# Altium PCB IMMO-2017-10-10.PcbDoc
Units mm, origin at the board's own origin, x right, y up, seen from the top; angles counter-clockwise.
Board outline 420.07 x 335 mm, 2 copper layers (Top Layer, Bottom Layer); 79 components, 117 nets, 440 pads, 62 vias.
Unrouted connection lines stored in the file: 1.
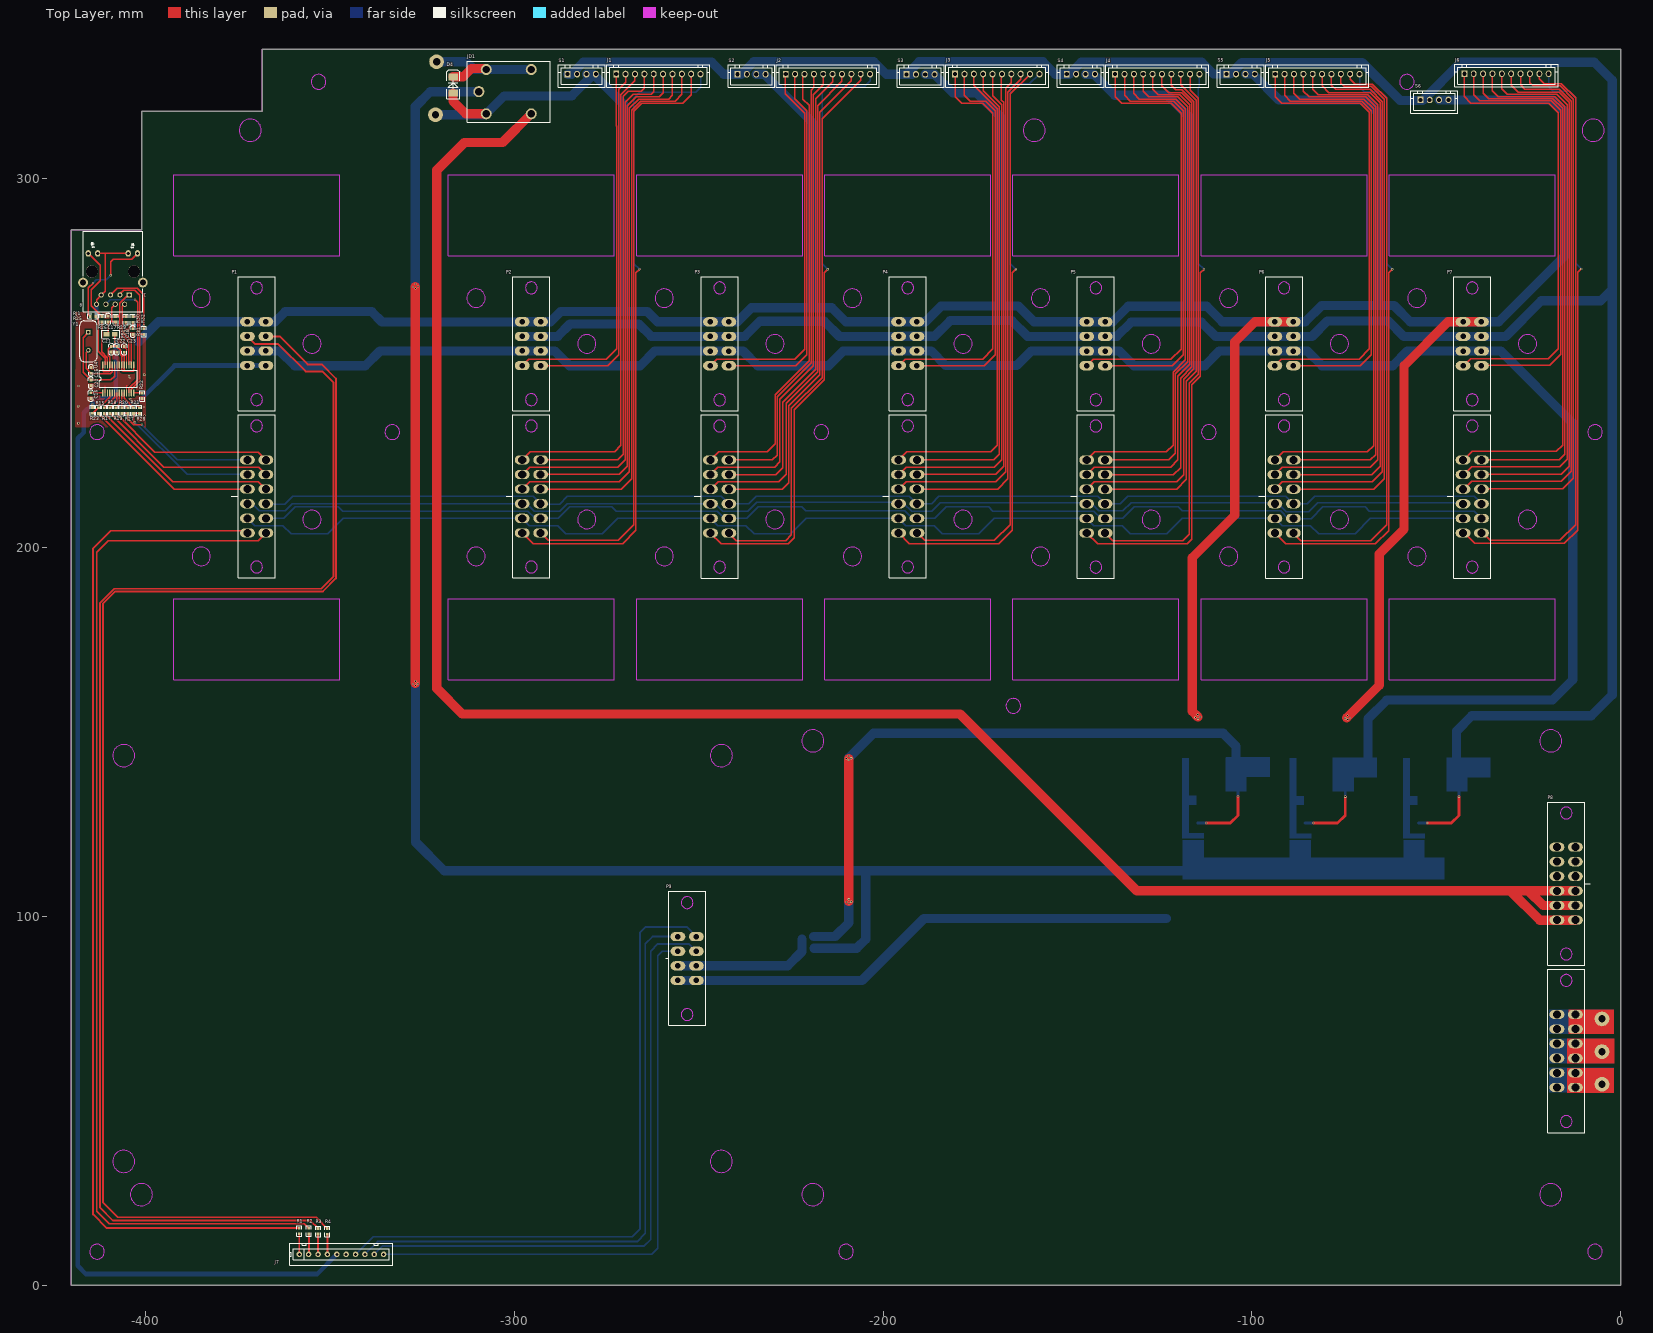
[diagram p0: Top Layer view]
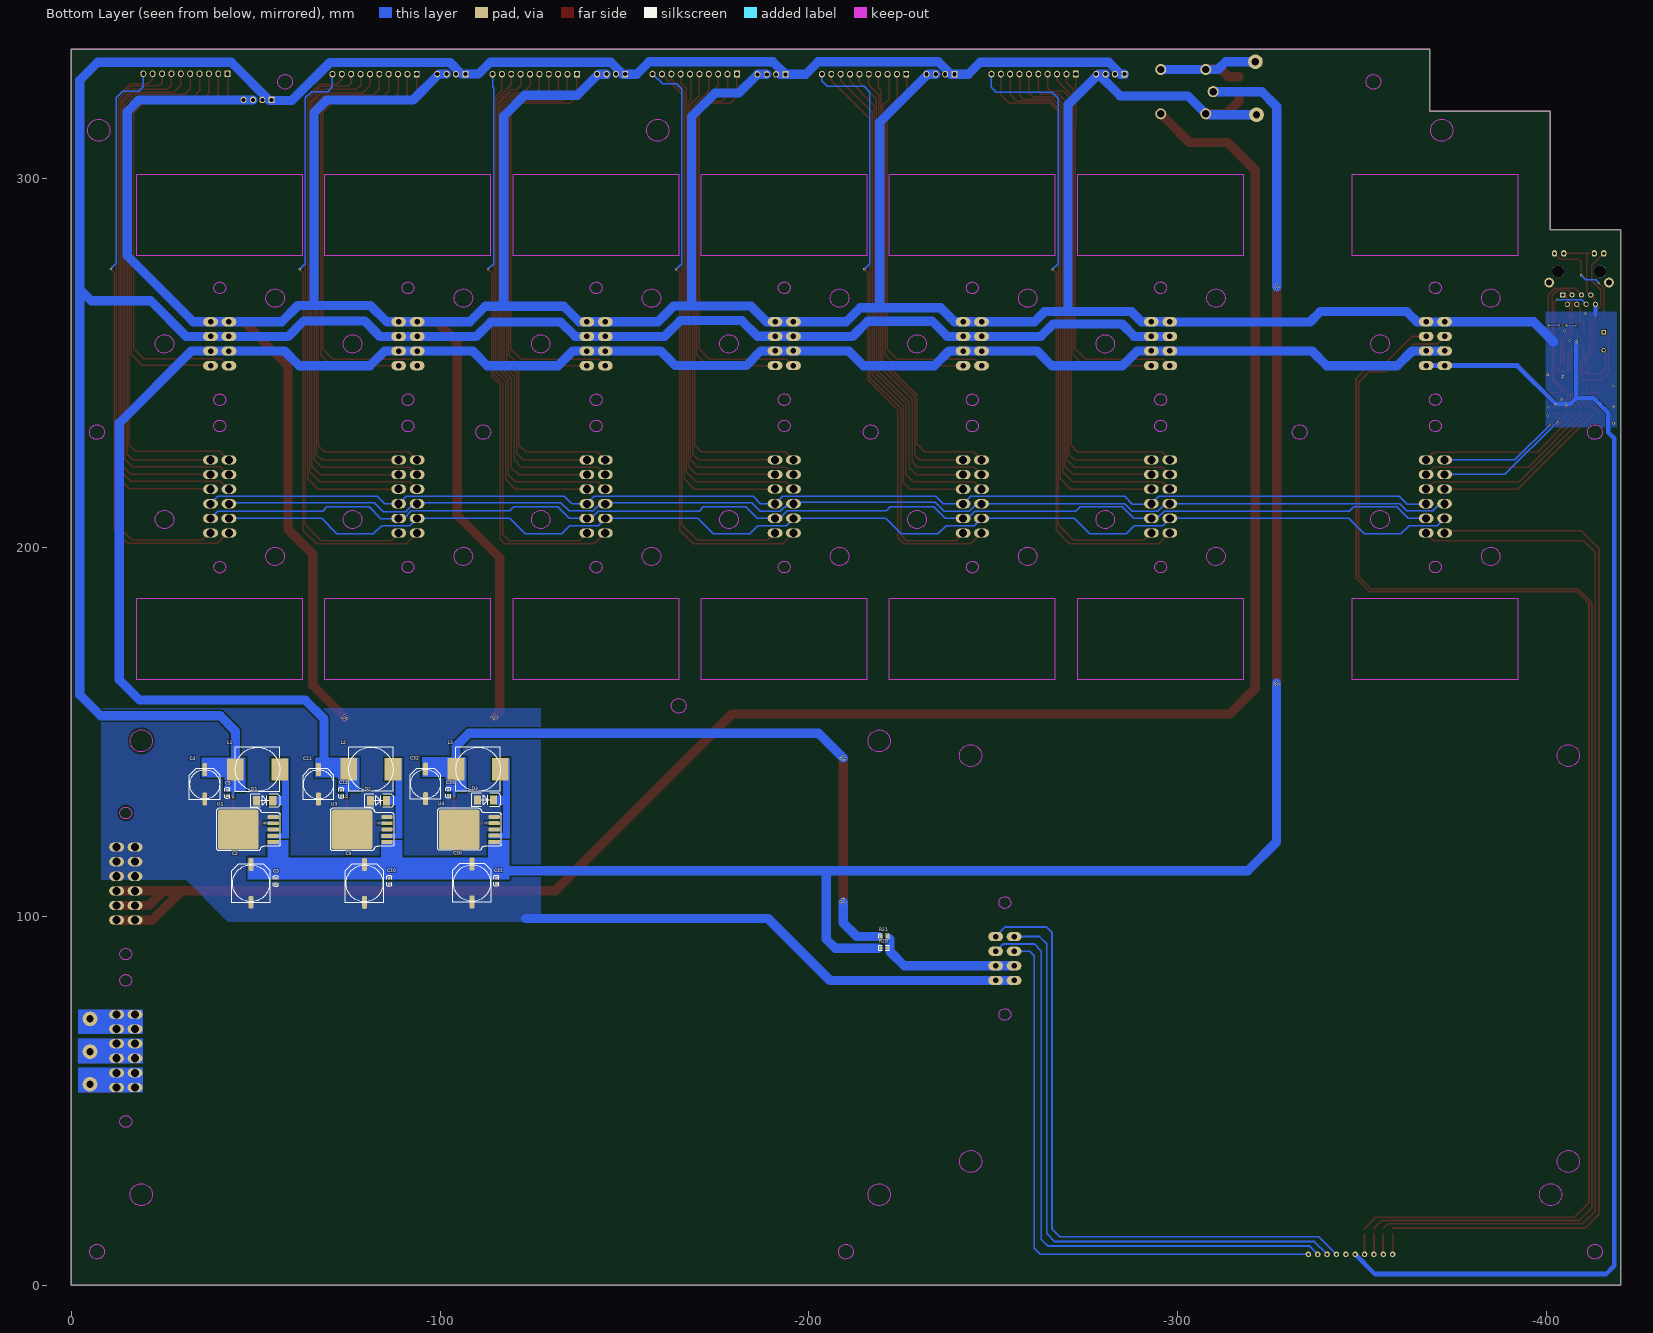
[diagram p1: Bottom Layer view, seen from below]
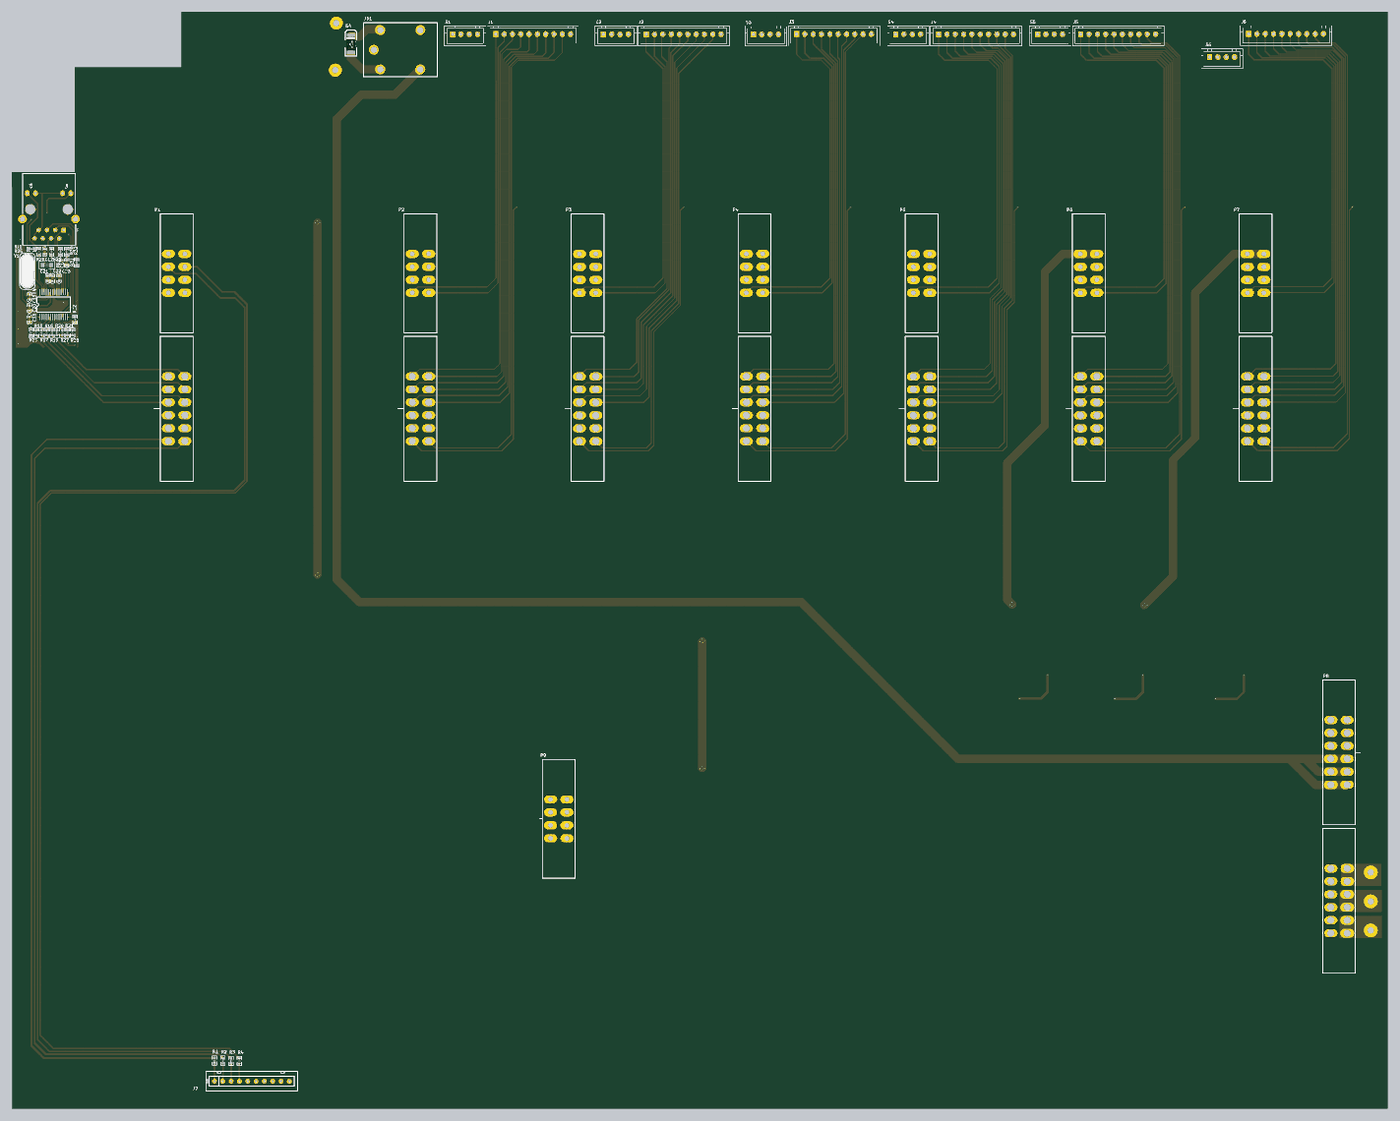
[diagram p2: 3D render of the assembled board from above, using the file's embedded part models]
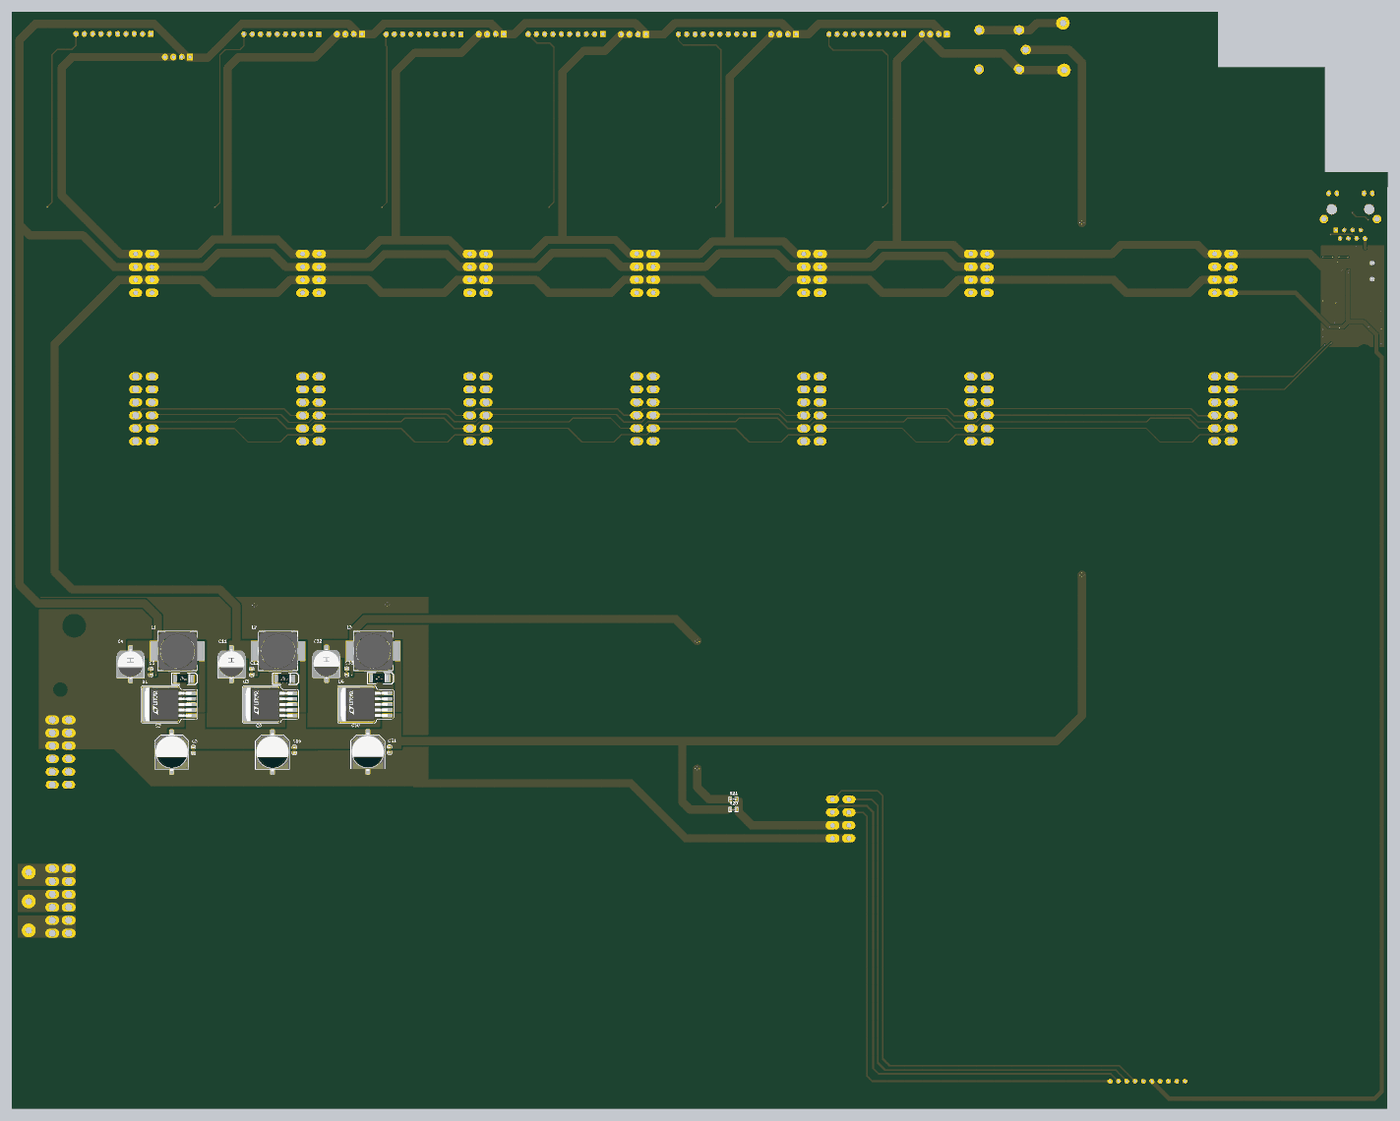
[diagram p3: 3D render of the assembled board from below, using the file's embedded part models]

## Layer stack, top to bottom
Top Layer: signal copper 0.0356
Dielectric: core 0.32, FR-4, Dk 4.8
Bottom Layer: signal copper 0.0356

## Board outline
-368.3,335 -368.3,318.1 -400.874,318.1 -400.874,286.203 -400.971,286.106 -420.065,286.106 -420.065,281.534 -420.04,281.508 -420,281.468 -420,0 0,0 0,335

## Design rules (kind name [scope] priority, off if disabled: settings)
Clearance [All] p1: gap=0.203
DiffPairsRouting [All] p1: maxlimit=0.254 minlimit=0.254 mostfreqgap=0.254 maxuncoupledlength=12.7
PlaneConnect [All] p1: planeconnectstyle=Direct reliefexpansion=0.508 reliefentries=4 reliefconductorwidth=0.254 reliefairgap=0.254
PolygonConnect [All] p1: connectstyle=Direct reliefconductorwidth=0.254 reliefentries=4 polygonreliefangle="90 Angle" airgapwidth=0.254
RoutingVias [All] p1: holewidth=0.711 width=1.27 viastyle="Through Hole" minholewidth=0.711 minwidth=1.27 maxholewidth=0.711 maxwidth=1.27
SolderMaskExpansion [All] p1: expansion=0.102
Width [All] p1: maxlimit=5.08 minlimit=0.254 preferedwidth=0.254
26 further rules are at their usual default settings.

## Classes and differential pairs
component class 02-MCU: C2 C3 C4 C5 C9 C10 C11 C12 C15 C16 C17 C18 C20 C21 C22 C23 C30 C31 C32 C33 D2 D3 D4 FB1 J1 J2 J3 J4 J5 J6 J7 JD1 L1 L2 L3 P1 P2 P3 P4 P5 P6 P7 P8 P9 R3 R4 R15 R17 R18 R19 R20 R21 R22 R23 R25 R26 R27 R28 R29 R30 R31 R32 RJ1 S1 S2 S3 S4 S5 S6 U1 U3 U4 Y1
differential pair TPIN1: +TPIN1_P -TPIN1_N
differential pair TPOUT1: +TPOUT1_P -TPOUT1_N

## Components (designator, comment, footprint, x,y, rotation, side; value= is the part's Value field where it differs from the comment)
C2 "220uF/50V,K-10" ED10 -48.768,108.89 r270 bottom
C3 "100n,50V,J" C0603 -55.423,110.261 r270 bottom
C4 "220uF/35V,K-8" ED8 -36.22,135.738 r270 bottom
C5 "100n,50V,J" C0603 -42.367,134.137 r270 bottom
C9 "220uF/50V,K-10" ED10 -79.527,108.864 r270 bottom
C10 "100n,50V,J" C0603 -86.233,110.312 r270 bottom
C11 "220uF/35V,K-8" ED8 -67.056,135.738 r270 bottom
C12 "100n,50V,J" C0603 -73.203,134.163 r270 bottom
C15 "30p,50V,J" C0603 -414.68,247.167 r90 top
C16 "30p,50V,J" C0603 -414.706,245.339 r270 top
C17 "100n,50V,J" C0603 -410.058,261.061 r90 top
C18 "100n,50V,J" C0603 -403.352,259.207 r270 top
C20 "10u,50V,J" C0603 -414.731,240.309 r90 top
C21 "100n,50V,J" C0603 -409.169,254.406 r270 top
C22 "100n,50V,J" C0603 -407.695,254.381 r270 top
C23 "100n,50V,J" C0603 -405.681,252.857 r90 top
C30 "220uF/50V,K-10" ED10 -108.661,108.966 r270 bottom
C31 "100n,50V,J" C0603 -115.265,110.338 r270 bottom
C32 "220uF/35V,K-8" ED8 -96.063,135.839 r270 bottom
C33 "100n,50V,J" C0603 -102.21,134.214 r270 bottom
D1 "STK-40V/5A(SS54)" SMA -50.978,131.369 r180 bottom
D2 "STK-40V/5A(SS54)" SMA -81.813,131.369 r180 bottom
D3 "STK-40V/5A(SS54)" SMA -110.846,131.521 r180 bottom
D4 "STK-40V/2A(SS24)" SMA -316.586,323.825 r90 top
FB1 "10,1/8W,F" R0805 -410.489,257.708 r0 top
J1 "Header 10" PH2.54-10V#1 -272.313,328.244 r0 top
J2 "Header 10" PH2.54-10V#1 -226.365,328.219 r0 top
J3 "Header 10" PH2.54-10V#1 -180.467,328.244 r0 top
J4 "Header 10" PH2.54-10V#1 -137.084,328.219 r0 top
J5 "Header 10" PH2.54-10V#1 -93.691,328.228 r0 top
J6 "Header 10" PH2.54-10V#1 -42.429,328.32 r0 top
J7 "Header 10" PH2.54-10V#2 -335.356,8.331 r0 top
JD1 "Header 5" JDQ -307.543,329.463 r0 top
L1 "Power-33uH/3A" 127 -50.521,139.776 r0 bottom
L2 "Power-33uH/3A" 127 -81.255,139.802 r0 bottom
L3 "Power-33uH/3A" 127 -110.312,139.802 r0 bottom
P1 "Header 10X2" 805-2 -369.784,194.615 r90 top
P2 "Header 10X2" 805-2 -295.311,194.615 r90 top
P3 "Header 10X2" 805-2 -244.283,194.589 r90 top
P4 "Header 10X2" 805-2 -193.305,194.615 r90 top
P5 "Header 10X2" 805-2 -142.302,194.589 r90 top
P6 "Header 10X2" 805-2 -91.289,194.599 r90 top
P7 "Header 10X2" 805-2 -40.295,194.589 r90 top
P8 "Header 12X2" 805-3 -14.834,127.991 r270 top
P9 "Header 4X2" 805-4 -253.1,73.29 r90 top
R1 "360,1/10W,F" R0603 -358.216,13.894 r90 top
R2 "360,1/10W,F" R0603 -355.625,13.868 r90 top
R3 "360,1/10W,F" R0603 -353.136,13.818 r90 top
R4 "360,1/10W,F" R0603 -350.622,13.792 r90 top
R15 "1K,1/10W,F" R0603 -412.661,236.271 r90 top
R17 "1K,1/10W,F" R0603 -411.074,236.271 r90 top
R18 "1K,1/10W,F" R0603 -409.486,236.271 r90 top
R19 "1K,1/10W,F" R0603 -407.899,236.271 r90 top
R20 "360,1/10W,F" R0603 -221.056,91.338 r0 bottom
R20 "1K,1/10W,F" R0603 -406.311,236.271 r90 top
R21 "360,1/10W,F" R0603 -221.056,94.463 r0 bottom
R21 "1K,1/10W,F" R0603 -403.136,236.271 r90 top
R22 "4.7K,1/10W,F" R0603 -400.812,240.284 r90 top
R23 "10K,1/10W,F" R0603 -414.274,236.296 r90 top
R25 "1.5K,1/10W,F" R0603 -413.334,262.56 r180 top
R26 "1.5K,1/10W,F" R0603 -411.785,261.036 r90 top
R27 "10K,1/10W,F" R0603 -404.724,236.271 r90 top
R28 "10K,1/10W,F" R0603 -401.549,236.271 r90 top
R29 "50,1/10W,F" R0603 -408,261.023 r90 top
R30 "50,1/10W,F" R0603 -405.232,262.509 r270 top
R31 "50,1/10W,F" R0603 -400.355,259.207 r270 top
R32 "50,1/10W,F" R0603 -403.352,262.509 r270 top
RJ1 "HR911105A" HR911105A -404.292,268.376 r180 top
S1 "Header 4" PH2.54-4V -285.471,328.219 r0 top
S2 "Header 4" PH2.54-4V -239.446,328.193 r0 top
S3 "Header 4" PH2.54-4V -193.624,328.168 r0 top
S4 "Header 4" PH2.54-4V -150.19,328.219 r0 top
S5 "Header 4" PH2.54-4V -106.858,328.228 r0 top
S6 "Header 4" PH2.54-4V -54.356,321.234 r0 top
U1 "SVR-LM2596S-5.0/4.5-40V" SOT-263-5 -50.038,123.469 r90 bottom
U3 "SVR-LM2596S-5.0/4.5-40V" SOT-263-5 -80.874,123.469 r90 bottom
U4 "SVR-LM2596S-5.0/4.5-40V" SOT-263-5 -109.931,123.495 r90 bottom
U4 "ENC28J60" SSOP28762MM -411.531,241.859 r90 top
Y1 "25MHz" X49S -415.366,255.829 r270 top

## Footprints (in the part's own frame and the unit in brackets; to place one, negate y for a bottom-side part, rotate by r counter-clockwise, add the part's x,y. Pads: shape width x height; smd on the part's side, far side on the other; paste and mask are expansions set on the pad)
127 [mm]
  rect 4.5x6 smd: 1(-6,0) 2(6,0)
  silkscreen extent -6,-6 6,6, body extent -6.05,-5.94 5.95,6.06, height 8
805-2 [mm]
  oval 2.5x4 hole 1.5: 1(66.487,2.489) 2(66.487,-2.511) 3(62.527,2.489) 4(62.527,-2.511) 5(58.567,2.489) 6(58.567,-2.511) 7(54.607,2.489) 8(54.607,-2.511)
  oval 2.5x4 hole 2.2: 9(29.046,2.489) 10(29.046,-2.511) 11(25.086,2.489) 12(25.086,-2.511) 13(21.126,2.489) 14(21.126,-2.511) 15(17.166,2.489) 16(17.166,-2.511) 17(13.206,2.489) 18(13.206,-2.511) 19(9.246,2.489) 20(9.246,-2.511)
  Keep-Out Layer circle w0.203: c45.362,0 r1.6
  Keep-Out Layer circle w0.203: c75.694,0 r1.6
  Keep-Out Layer circle w0.203: c38.252,0 r1.6
  Keep-Out Layer circle w0.203: c0,0 r1.6
  silkscreen extent -2.96,-5.01 78.73,6.83
805-3 [mm]
  oval 2.5x4 hole 2.2: 1(74.44,2.51) 2(74.44,-2.49) 3(70.48,2.51) 4(70.48,-2.49) 5(66.52,2.51) 6(66.52,-2.49) 7(62.56,2.51) 8(62.56,-2.49) 9(58.6,2.51) 10(58.6,-2.49) 11(54.64,2.51) 12(54.64,-2.49) 13(29.077,2.51) 14(29.077,-2.49) 15(25.117,2.51) 16(25.117,-2.49) 17(21.157,2.51) 18(21.157,-2.49) 19(17.197,2.51) 20(17.197,-2.49) 21(13.237,2.51) 22(13.237,-2.49) 23(9.277,2.51) 24(9.277,-2.49)
  Keep-Out Layer circle w0.203: c0.032,0.02 r1.6
  Keep-Out Layer circle w0.203: c38.284,0.02 r1.6
  Keep-Out Layer circle w0.203: c45.395,0.02 r1.6
  Keep-Out Layer circle w0.203: c83.647,0.02 r1.6
  silkscreen extent -2.93,-4.99 86.68,6.58
805-4 [mm]
  oval 2.5x4 hole 1.5: 1(21.148,2.489) 2(21.148,-2.511) 3(17.188,2.489) 4(17.188,-2.511) 5(13.228,2.489) 6(13.228,-2.511) 7(9.268,2.489) 8(9.268,-2.511)
  Keep-Out Layer circle w0.203: c30.355,0 r1.6
  Keep-Out Layer circle w0.203: c0.023,0 r1.6
  silkscreen extent -2.94,-5.01 33.39,5.76
C0603 [mil]
  rect 30x30 smd: 1(0,0) 2(60,0)
  silkscreen extent -30,-27 90,27, body extent -1,-16 62,15, height 24
ED8 [mm]
  rrect50% 3.5x1.3 smd: 1(-4,0) 2(4,0)
  silkscreen extent -4.15,-4.15 4.15,4.15, body extent -4.53,-4.18 4.47,4.12, height 10.5
ED10 [mm]
  rrect50% 3.5x1.3 smd: 1(-5.127,0) 2(5.127,0)
  silkscreen extent -5.2,-5.2 5.2,5.2, body extent -5.77,-5.12 5.83,5.18, height 10.21
HR911105A [mm]
  rect 1.4x1.4 hole 0.9: 1(0,0)
  round 1.4 hole 0.9: 2(1.27,2.54) 3(2.54,0) 4(3.81,2.54) 5(5.08,0) 6(6.35,2.54) 7(7.62,0) 8(8.89,2.54)
  oval 1.4x1.8 hole 0.9: 9(-2.23,-11.25) 10(0.31,-11.25) 11(8.58,-11.25) 12(11.12,-11.25)
  round 3.25 hole 3.25: H1(-1.27,-6.35) H2(10.16,-6.35)
  round 2.65 hole 1.65: H3(-3.655,-3.35) H4(12.545,-3.35)
  silkscreen extent -3.67,-17.27 12.5,4.57
JDQ [mm]
  round 3 hole 2: 1(0,0) 2(0,-12) 3(-2,-6) 4(12.2,0) 5(12.2,-12)
  silkscreen extent -5.15,-14.25 17.35,2.25
PH2.54-4V [mm]
  rect 1.6x1.8 hole 1.1: 1(0,0)
  oval 1.6x1.8 hole 1.1: 2(2.54,0) 3(5.08,0) 4(7.62,0)
  silkscreen extent -2.54,-3.56 10.16,2.54
PH2.54-10V#1 [mm]
  rect 1.6x1.8 hole 1.1: 1(0,0)
  oval 1.6x1.8 hole 1.1: 2(2.54,0) 3(5.08,0) 4(7.62,0) 5(10.16,0) 6(12.7,0) 7(15.24,0) 8(17.78,0) 9(20.32,0) 10(22.86,0)
  silkscreen extent -2.54,-3.56 25.4,2.54
PH2.54-10V#2 [mm]
  round 1.5 hole 0.8: 1(-22.86,0) 2(-20.32,0) 3(-17.78,0) 4(-15.24,0) 5(-12.7,0) 6(-10.16,0) 7(-7.62,0) 8(-5.08,0) 9(-2.54,0) 10(0,0)
  silkscreen extent -25.5,-3 2.5,3
R0603 [mil]
  rect 30x30 smd: 1(0,0) 2(60,0)
  silkscreen extent -26,-26 85,27, body extent -1,-16 62,15, height 18
R0805 [mil]
  rect 60x50 smd: 1(0,0) 2(90,0)
  silkscreen extent -50,-45 140,45, body extent 6,-25 85,25, height 22
SMA [mil]
  rect 75x100 smd: 1(-28.61,-2) 2(144.61,-2)
  silkscreen extent -88,-72 222,68, body extent -32,-54 150,52, height 94
SOT-263-5 [mm]
  rect 1.07x3 smd: 1(-3.4,-4.75)
  rrect50% 1.07x3 smd: 2(-1.7,-4.75) 3(0,-4.75) 4(1.7,-4.75) 5(3.4,-4.75)
  rrect10% 10.8x11 smd: 3(0,4.75)
  silkscreen extent -5.7,-6.66 5.7,10.5, body extent -5.14,-4.8 5.09,9.55, height 4.48
SSOP28762MM [mm]
  rect 1.905x0.35 smd: 1(-0.025,0)
  oval 1.905x0.35 smd: 2(-0.025,-0.65) 3(-0.025,-1.3) 4(-0.025,-1.95) 5(-0.025,-2.6) 6(-0.025,-3.25) 7(-0.025,-3.9) 8(-0.025,-4.55) 9(-0.025,-5.2) 10(-0.025,-5.85) 11(-0.025,-6.5) 12(-0.025,-7.15) 13(-0.025,-7.8) 14(-0.025,-8.45) 15(7.575,-8.45) 16(7.575,-7.8) 17(7.575,-7.15) 18(7.575,-6.5) 19(7.575,-5.85) 20(7.575,-5.2) 21(7.575,-4.55) 22(7.575,-3.9) 23(7.575,-3.25) 24(7.575,-2.6) 25(7.575,-1.95) 26(7.575,-1.3) 27(7.575,-0.65) 28(7.575,0)
  silkscreen extent 1.44,-9.32 6.07,0.87
X49S [mm]
  rect 1.2x1.2 hole 0.7: 1(-2.44,0)
  round 1.2 hole 0.7: 2(2.44,0)
  silkscreen extent -5.55,-2.35 5.55,2.35, body extent -5.41,-2.26 5.39,2.24, height 3.5

## Part data
C2 C9 C30: library part 30604456
C3 C5 C10 C12 C17 C18 C21 C22 C23 C31 C33: library part 30602059
C4 C11 C32: library part 30604455
C15 C16: library part 30602022
C20: library part 30602064
D1 D2 D3: library part 30607216
D4: library part 30607209
FB1: library part 30601226
J1 J2 J3 J4 J5 J6 J7: "Header, 10-Pin"
JD1: "Header, 5-Pin"
L1 L2 L3: library part 30606017
P1 P2 P3 P4 P5 P6 P7: "Header, 10-Pin, Dual row"
P8: "Header, 12-Pin, Dual row"
P9: "Header, 4-Pin, Dual row"
R1 R2 R3 R4 R20 R21: library part 30601064
R15 R17 R18 R19 R20 R21: library part 30601075
R22: library part 30601091
R23 R27 R28: library part 30601099
R25 R26: library part 30601079
R29 R30 R31 R32: library part 30601043, "51,1/10W,F"
S1 S2 S3 S4 S5 S6: "Header, 4-Pin"
U1 U3 U4: library part 30614002
Y1: library part 30612003, "16MHz"

## Free pads (board coordinates)
  round 4 hole 2: 6(-321.31,317.221) 6(-321.005,331.597) 6(-5.131,54.407) 6(-5.131,63.271) 6(-5.131,72.136)

## Via types
v1: diameter 0.6, hole 0.3, Top Layer to Bottom Layer, tented both sides, 62 vias

## Nets (pads, with @x,y where several pads share a name; then routed paths per layer and width w, separated by ;. In a path a pad name is that pad's centre, name@x,y a point inside that pad or via, vN(x,y) a via of type N, cw(c..) or ccw(c..) an arc to the next point about the centre after c; other vN are vias at no path point)
1: J7.8 P9.1 | length 166.5
  Bottom Layer w0.508: J7.8 -337.007,11.76 -266.675,11.76 -264.439,13.995 -264.439,92.481 -262.482,94.438 P9.1
2: J7.7 P9.2 | length 177.3
  Bottom Layer w0.508: J7.7 -338.226,13.081 -267.97,13.081 -265.887,15.164 -265.887,18.618 ; -265.862,18.593 -265.887,18.618 ; P9.2 -253.204,97.053 -264.338,97.053 -265.887,95.504 -265.887,18.618
3: J7.10 P9.3 | length 160.2
  Bottom Layer w0.508: J7.10 -262.712,8.331 -261.061,9.982 -261.061,89.23 -259.813,90.478 P9.3
4: J7.9 P9.4 | length 168.8
  Bottom Layer w0.508: J7.9 -335.636,10.592 -264.719,10.592 -262.966,12.344 -262.966,90.526 -261.01,92.481 -252.592,92.481 P9.4
24V: C2.1 C3.1 C9.1 C10.1 C30.1 C31.1 JD1.3 R20.2@-219.532,91.338 U1.1 U3.1 U4.1@-114.681,120.095 | length 464.2
  Top Layer w2.54: -326.746,163.144 -326.746,270.561
  Bottom Layer w2.54: -326.746,270.561 -326.746,319.456 -322.738,323.463 JD1.3 ; -326.72,163.068 -326.72,120.066 -318.922,112.268 -204.699,112.268 ; -218.719,91.338 -207.112,91.338 -204.699,93.751 -204.699,112.268 ; -117.424,112.268 -204.699,112.268
  other v1: -326.746,162.509 -327.406,162.916 -326.085,162.992 -326.746,163.652 -326.72,270.154 -327.381,270.561 -326.06,270.637 -326.72,271.297
24V-1: D4.2 JD1.1 JD1.4 pad.6@-321.005,331.597 | length 36.6
  Top Layer w2.5: D4.2 -313.801,327.498 -311.582,329.717 -307.797,329.717 JD1.1
  Bottom Layer w2.5: pad.6@-321.005,331.597 -313.004,331.597 -310.871,329.463 JD1.1 JD1.4
24V-OUT: JD1.5 P8.13 P8.14 P8.15 P8.16 P8.17 P8.18 | length 548.6
  Top Layer w2.54: -320.929,171.348 -320.929,161.696 ; JD1.5 -303.104,309.702 -313.461,309.702 -320.929,302.235 -320.929,161.696 ; P8.13 P8.14 -21.976,98.913 -29.896,106.833 ; P8.15 P8.16 -21.059,102.873 -25.019,106.833 ; P8.17 P8.18 -25.019,106.833 ; -320.929,161.696 -314.02,154.788 -179.146,154.788 -131.192,106.833 -29.896,106.833 ; -29.896,106.833 -25.019,106.833
+3.3V: C21.1 C22.1 C23.1 FB1.2 J7.5 P1.7 P1.8 R23.2 R27.2 R28.2 U4.15 U4.19 U4.20 U4.25 U4.28 | length 414.5
  Top Layer w0.381: R23.2 v1(-414.274,238.785) ; U4.28 -411.531,247.904 -411.226,247.599 -409.854,247.599 -409.581,247.873 U4.25 -409.581,251.581 -409.943,251.943 -409.943,253.632 C21.1 C22.1@-407.721,254.406 ; FB1.2 -408.203,254.889 C22.1@-407.721,254.406 ; -406.331,251.823 U4.20 -406.331,247.886 -406.07,247.625 -405.74,247.625 ; -405.681,252.306 -406.248,251.739 -406.679,252.171 -406.679,253.365 C22.1 C22.1@-407.721,254.406 ; v1(-405.409,238.481) R27.2 ; U4.15 -403.081,247.769 -403.225,247.625 -405.74,247.625 ; v1(-402.438,238.811) -401.549,237.922 R28.2 ; -405.74,247.625 -405.681,247.683 U4.19 C23.1@-405.681,252.646 ; C23.1@-405.681,252.646 -405.892,252.857 C23.1 C23.1@-405.681,252.646
  Bottom Layer w1.27: v1@-408,255.854 -408,240.335 ; P1.8 P1.7 -392.026,249.222 v1(-402.438,238.811) -406.476,238.811 -408,240.335 ; J7.5 -353.39,2.997 -416.052,2.997 -418.262,5.207 -418.262,229.489 -416.662,231.089 -416.662,236.398 v1(-414.274,238.785) -412.725,240.335 -408,240.335
  other v1: -408.203,255.346 -408.203,256.057
CAN_C\S\3: P1.9 R20.1@-406.311,236.271 R27.1 | length 40.2
  Top Layer w0.381: R20.1@-406.311,236.271 R27.1 -404.724,234.807 -403.081,233.164 -400.972,233.164 v1(-400.888,233.248)
  Bottom Layer w0.381: v1@-400.914,233.223 -391.351,223.66 P1.9
CAN_CLK: P1.10 R19.1 | length 45.8
  Top Layer w0.381: R19.1 -397.383,225.755 -369.368,225.755 P1.10
CAN_H-1: J1.5 P2.11 | length 140.2
  Top Layer w0.381: P2.11 -295.769,221.732 -271.891,221.732 -269.885,223.739 -269.885,320.589 -267.691,322.783 -262.814,322.783 -262.153,323.444 J1.5
CAN_H-2: J2.5 P3.11 | length 130.2
  Top Layer w0.381: P3.11 -244.74,221.707 -229.337,221.707 -227.94,223.104 -227.94,240.157 -218.856,249.241 -218.856,322.672 -216.205,325.323 J2.5
CAN_H-3: J3.5 P4.11 | length 135.1
  Top Layer w0.381: P4.11 -193.762,221.732 -169.885,221.732 -167.878,223.739 -167.878,319.897 -170.307,322.326 J3.5
CAN_H-4: J4.5 P5.11 | length 139.8
  Top Layer w0.381: P5.11 -142.759,221.707 -122.057,221.707 -120.066,223.698 -120.066,246.355 -116.875,249.545 -116.875,319.872 -119.634,322.631 -125.4,322.631 -126.924,324.155 J4.5
CAN_H-5: J5.5 P6.11 | length 149.3
  Top Layer w0.381: P6.11 -91.746,221.717 -67.869,221.717 -65.862,223.723 -65.862,316.325 -65.862,319.881 -68.621,322.64 -82.007,322.64 -83.531,324.164 J5.5
CAN_H-6: J6.5 P7.11 | length 149.3
  Top Layer w0.381: P7.11@-42.516,219.777 -40.484,221.809 -16.606,221.809 -14.6,223.815 -14.6,319.973 -17.359,322.732 -30.745,322.732 -32.269,324.256 J6.5
CAN_H_01: P1.17 P2.17 P3.17 P4.17 P5.17 P6.17 P7.17 | length 350.3
  Bottom Layer w0.381: P1.17@-372.278,207.825 -370.315,205.862 -362.65,205.862 -360.415,203.627 -350.56,203.627 -346.369,207.818 -297.803,207.818 P2.17 -295.838,205.857 -288.173,205.857 -285.937,203.622 -276.082,203.622 -271.891,207.813 P3.17@-246.805,207.813 ; P3.17 -244.809,205.832 -237.144,205.832 -234.909,203.597 -225.054,203.597 -220.863,207.788 P4.17@-195.776,207.788 ; P4.17 -193.831,205.857 -186.166,205.857 -183.931,203.622 -174.076,203.622 -169.885,207.813 P5.17@-144.798,207.813 ; P5.17 -142.828,205.832 -135.163,205.832 -132.928,203.597 -123.073,203.597 -118.882,207.788 -93.795,207.788 P6.17 -91.815,205.842 -84.15,205.842 -81.915,203.606 -72.06,203.606 -67.869,207.797 P7.17@-42.787,207.797
CAN_H_02: P1.15 P2.15 P3.15 P4.15 P5.15 P6.15 P7.15 | length 340.5
  Bottom Layer w0.381: P1.15@-372.278,211.785 -371.018,211.785 -369.041,209.809 -362.082,209.809 -360.11,211.78 P2.15 -296.54,211.78 -294.564,209.804 -287.604,209.804 -285.653,211.755 P3.15 -245.41,211.755 -243.434,209.779 -236.601,209.779 -234.239,212.141 -196.155,212.141 P4.15 -194.331,211.78 -192.278,209.728 -186.766,209.728 -184.455,212.039 -145.075,212.039 P5.15 -143.454,211.755 -141.554,209.855 -134.976,209.855 -132.74,212.09 -94.104,212.09 P6.15 -92.842,211.765 -90.729,209.652 -84.607,209.652 -82.22,212.039 -43.069,212.039 P7.15
CAN_I\N\T\3: P1.13 R15.1 | length 48.9
  Top Layer w0.381: R15.1 -392.131,215.74 P1.13
CAN_L_01: P1.18 P2.18 P3.18 P4.18 P5.18 P6.18 P7.18 | length 345.3
  Bottom Layer w0.254: P1.18@-367.306,207.853 P1.18 ; P2.18@-292.828,207.848 P2.18 P2.18@-292.796,207.816 ; P3.18@-241.8,207.823 P3.18@-241.767,207.79 ; P4.18@-190.822,207.848 P4.18@-190.789,207.816 ; P5.18@-139.819,207.823 P5.18@-139.786,207.79 ; P6.18 P6.18@-88.746,207.772
  Bottom Layer w0.381: P1.18 -362.449,207.82 -359.325,210.945 -347.647,210.945 -346.486,209.783 -296.245,209.783 -294.282,207.82 P2.18 ; P2.18@-292.796,207.816 -287.972,207.816 -284.848,210.94 -273.475,210.94 -272.313,209.779 -244.958,209.779 -243.002,207.823 -241.8,207.823 P3.18 ; P3.18@-241.767,207.79 -236.943,207.79 -233.819,210.914 -222.014,210.914 -220.922,209.822 -194.049,209.822 -192.075,207.848 -190.822,207.848 P4.18 ; P4.18@-190.789,207.816 -185.965,207.816 -182.841,210.94 -171.392,210.94 -170.249,209.797 -142.868,209.797 -140.894,207.823 -139.819,207.823 P5.18 ; P5.18@-139.786,207.79 -134.962,207.79 -131.838,210.914 -120.008,210.914 -118.916,209.822 -92.246,209.822 -90.228,207.805 P6.18 P6.18@-88.75,207.777 ; P6.18@-88.746,207.772 -83.922,207.772 -80.797,210.896 -69.266,210.896 -68.174,209.804 -39.794,209.804 P7.18
CAN_L_1: J1.6 P2.12 | length 138.4
  Top Layer w0.381: P2.12 -271.485,219.7 -269.3,221.885 -269.3,319.684 -266.938,322.047 -260.68,322.047 -259.613,323.113 J1.6
CAN_L_02: P1.16 P2.16 P3.16 P4.16 P5.16 P6.16 P7.16 | length 339.7
  Bottom Layer w0.381: P1.16@-367.278,211.785 -367.181,211.688 -362.133,211.688 -359.999,213.822 -294.842,213.822 P2.16 -292.704,211.684 -287.655,211.684 -285.521,213.817 -243.834,213.817 P3.16 -236.377,211.755 -234.315,213.817 -192.831,213.817 P4.16 -186.822,211.78 -184.836,213.766 -141.802,213.766 P5.16 -135.641,211.755 -133.629,213.766 -90.78,213.766 P6.16 -88.773,211.76 -85.039,211.76 -83.033,213.766 -39.796,213.766 P7.16
CAN_L_2: J2.6 P3.12 | length 127.6
  Top Layer w0.381: P3.12 -229.083,219.675 -227.203,221.555 -227.203,239.344 -218.272,248.275 -218.272,321.58 -213.665,326.187 J2.6
CAN_L_3: J3.6 P4.12 | length 131.1
  Top Layer w0.381: P4.12 -169.478,219.7 -167.294,221.885 -167.294,320.558 -167.919,321.183 -167.919,328.092 J3.6
CAN_L_4: J4.6 P5.12 | length 134.5
  Top Layer w0.381: P5.12 -121.269,219.675 -119.355,221.59 -119.355,245.821 -116.291,248.885 -116.291,320.507 -118.999,323.215 -122.53,323.215 -124.384,325.069 J4.6
CAN_L_5: J5.6 P6.12 | length 143.8
  Top Layer w0.381: P6.12 -67.462,219.685 -65.278,221.869 -65.278,320.516 -67.986,323.225 -79.137,323.225 -80.991,325.079 J5.6
CAN_L_6: J6.6 P7.12 | length 143.8
  Top Layer w0.381: P7.12@-37.516,219.777 -16.2,219.777 -14.016,221.961 -14.016,320.608 -16.724,323.317 -27.874,323.317 -29.729,325.171 J6.6
CAN_RST: P1.11 R21.1@-403.136,236.271 R28.1 | length 40.5
  Top Layer w0.381: v1(-402.793,233.858) -403.136,234.201 -403.136,236.271 R28.1
  Bottom Layer w0.381: v1(-402.793,233.858) -388.636,219.7 P1.11
CAN_SI: P1.12 R18.1 | length 49.1
  Top Layer w0.381: R18.1 -394.906,221.691 -369.264,221.691 P1.12
CAN_SO: P1.14 R17.1 | length 52.3
  Top Layer w0.381: R17.1 -392.582,217.78 -369.313,217.78 P1.14
DO-1-1: J1.1 P2.7 | length 102
  Top Layer w0.381: P2.7 -296.03,250.993 -274.965,250.993 -272.221,253.736 -272.221,314.106 -272.313,314.198 J1.1
DO-1-2: J2.1 P3.7 | length 104.2
  Top Layer w0.381: P3.7 -245.001,250.968 -223.936,250.968 -221.193,253.711 -221.193,317.637 -226.466,322.91 -226.466,328.117 J2.1
DO-1-3: J3.1 P4.7 | length 109.8
  Top Layer w0.381: P4.7 -194.023,250.993 -172.958,250.993 -170.215,253.736 -170.215,314.106 -170.231,314.122 ; J3.1 -180.467,322.123 -178.664,320.319 -172.999,320.319 -170.231,317.551 -170.231,314.122 ; -170.231,313.858 -170.231,314.122
DO-1-4: J4.1 P5.7 | length 117.2
  Top Layer w0.381: P5.7 -143.02,250.968 -121.955,250.968 -119.212,253.711 -119.212,314.081 -119.212,317.637 -121.869,320.294 -135.28,320.294 -137.084,322.097 J4.1
DO-1-5: J5.1 P6.7 | length 124.9
  Top Layer w0.381: P6.7 -92.007,250.977 -70.942,250.977 -68.199,253.721 -68.199,314.09 -68.199,317.83 -70.672,320.304 -91.888,320.304 -93.691,322.107 J5.1
DO-1-6: J6.1 P7.7 | length 124.8
  Top Layer w0.381: P7.7@-42.516,249.298 -40.745,251.069 -19.68,251.069 -16.937,253.813 -16.937,317.738 -19.594,320.396 -40.625,320.396 -42.429,322.199 J6.1
GND: C2.2 C3.2 C4.2 C5.2 C9.2 C10.2 C11.2 C12.2 C15.2 C16.2 C17.2 C18.2 C20.1 C21.2 C22.2 C23.2 C30.2 C31.2 C32.2 C33.2 D1.1 D2.1 D3.1 D4.1 JD1.2 P1.1 P1.2 P2.1 P2.2 P3.1 P3.2 P4.1 P4.2 P5.1 P5.2 P6.1 P6.2 P7.1 P7.2 P8.19 P8.20 P8.21 P8.22 P8.23 P8.24 P9.7 P9.8 pad.6@-321.31,317.221 R22.1 RJ1.7 RJ1.8 RJ1.10 RJ1.11 S1.3 S1.4 S2.3 S2.4 S3.3 S3.4 S4.3 S4.4 S5.3 S5.4 S6.3 S6.4 U1.3 U1.5 U3.3 U3.5 U4.2@-410.881,241.833 U4.3@-105.181,123.495 U4.3@-114.681,123.495 U4.5@-114.681,126.895 U4.11 U4.18 U4.21 U4.22 | length 1368.7
  Top Layer w0.254: U4.2@-410.881,241.833 -410.881,243.764 ; C23.2 -404.97,253.67 -404.97,249.495 U4.18 ; U4.11 -405.031,243.942 -404.901,243.942
  Top Layer w0.381: RJ1.8 -413.182,267.106 RJ1.7 -410.87,269.418 -410.87,279.626 ; RJ1.11 -410.87,279.626 ; RJ1.10 -410.87,279.626
  Top Layer w2.5: D4.1 -316.535,320.904 -313.095,317.463 JD1.2 ; -114.605,153.975 -116.18,155.55 -116.18,197.155 -104.648,208.686 -104.648,255.6 -99.162,261.086 P6.1 P6.2 ; -74.32,153.772 -65.507,162.585 -65.507,198.171 -58.75,204.927 -58.75,249.199 -46.873,261.077 P7.1 P7.2
  Bottom Layer w1.016: -413.258,262.865 -413.182,262.941 RJ1.8
  Bottom Layer w2.5: -401.752,255.702 -401.752,255.727 -396.377,261.102 P1.1 ; P1.1@-372.491,261.061 -364.819,261.061 -362.034,263.846 -338.596,263.846 -335.802,261.052 P2.1@-297.851,261.052 ; pad.6@-321.31,317.221 -307.786,317.221 JD1.2 -302.681,322.326 -284.353,322.326 S1.4@-278.46,328.219 ; P2.1 P2.2 -290.129,261.102 -287.344,263.887 -263.906,263.887 -261.112,261.093 P3.1@-246.788,261.093 ; S1.3 S1.4@-278.46,328.219 ; -270.231,264.293 -270.231,319.989 S1.4@-278.46,328.219 ; P9.7 P9.8 -205.715,82.558 -188.908,99.365 -123.241,99.365 ; P3.1@-246.753,261.096 -239.436,261.096 -235.636,264.897 -219.177,264.897 ; S2.3 -232.207,328.193 -219.202,315.189 -219.202,264.922 -219.177,264.897 ; P4.1@-195.81,261.086 -210.064,261.086 -213.874,264.897 -219.177,264.897 ; P4.1@-195.775,261.121 -188.484,261.121 -184.252,265.354 -163.328,265.354 -159.086,261.112 ; S3.3 -186.08,328.168 -181,323.088 -174.549,323.088 -168.123,316.662 -168.123,265.735 ; -159.051,261.077 P5.1 ; S4.3 -142.9,328.219 -137.185,322.504 -123.139,322.504 ; P5.1@-144.772,261.096 -137.735,261.096 -133.553,265.278 -112.274,265.278 -108.083,261.086 P6.1 P6.2 -85.522,261.086 -81.102,265.506 -61.519,265.506 -57.089,261.077 P7.1 P7.2 -33.106,261.077 -15.189,278.994 -15.189,318.008 -18.415,321.234 S6.4 S6.3 ; -122.911,322.504 -117.246,316.84 -117.246,265.455 ; S5.3 -99.679,328.228 -92.659,321.208 -69.266,321.208 -65.837,317.779 -65.837,266.192
  other v1: -74.041,153.289 -114.656,153.518 -74.727,153.645 -73.406,153.721 -115.341,153.873 -114.021,153.949 -74.066,154.381 -114.681,154.61 -418.109,233.604 -400.202,235.712 -400.279,237.998 -418.135,238.227 -403.885,240.106 -418.084,243.688 -404.114,245.847 -404.368,246.304 -400.253,246.736 -406.171,256.057 -404.774,258.674 -410.388,263.347
IN: P9.5 P9.6 R20.1@-221.056,91.338 R21.1@-221.056,94.463 | length 38.6
  Bottom Layer w2.54: P9.5 P9.6 -225.851,86.518 -221.971,90.399 -221.971,93.726
KL_15-1: J1.7 P2.13 | length 148.4
  Top Layer w0.381: P2.13 -295.746,217.795 -271.434,217.795 -268.716,220.513 -268.716,318.973 -266.227,321.462 -258.089,321.462 -257.073,322.478 J1.7
KL_15-2: J2.7 P3.13 | length 136.9
  Top Layer w0.381: P3.13 -244.717,217.77 -228.27,217.77 -226.289,219.751 -226.289,238.989 -217.688,247.59 -217.688,319.675 -211.125,326.238 J2.7
KL_15-3: J3.7 P4.13 | length 139.4
  Top Layer w0.381: P4.13 -193.739,217.795 -169.428,217.795 -166.71,220.513 -166.71,324.45 -165.227,325.933 J3.7
KL_15-4: J4.7 P5.13 | length 141.1
  Top Layer w0.381: P5.13 -142.736,217.77 -120.38,217.77 -118.542,219.608 -118.542,245.491 -115.707,248.326 -115.707,320.749 -119.011,324.053 -120.65,324.053 -121.844,325.247 J4.7
KL_15-5: J5.7 P6.13 | length 149.9
  Top Layer w0.381: P6.13 -91.723,217.78 -67.412,217.78 -64.694,220.497 -64.694,320.758 -67.998,324.063 -77.257,324.063 -78.451,325.257 J5.7
KL_15-6: J6.7 P7.13 | length 149.9
  Top Layer w0.381: P7.13@-42.516,215.817 -40.461,217.872 -16.149,217.872 -13.431,220.589 -13.431,320.85 -16.736,324.155 -25.995,324.155 -27.189,325.349 J6.7
KLINE_1: J1.9 P2.20 | length 163
  Top Layer w0.381: P2.20 -290.759,201.819 -271.79,201.819 -267.548,206.061 -267.548,318.186 -265.44,320.294 -254.305,320.294 -251.993,322.605 J1.9
KLINE_2: J2.9 P3.20 | length 151.1
  Top Layer w0.381: P3.20 -239.73,201.793 -226.365,201.793 -224.815,203.343 -224.815,237.592 -216.519,245.888 -216.519,316.068 -206.045,326.542 J2.9
KLINE_3: J3.9 P4.20 | length 152.3
  Top Layer w0.381: P4.20 -188.753,201.819 -169.783,201.819 -165.541,206.061 -165.541,322.85 J3.9
KLINE_4: J4.9 P5.20 | length 151
  Top Layer w0.381: P5.20 -137.749,201.793 -118.78,201.793 -117.043,203.53 -117.043,244.424 -114.538,246.929 -114.538,321.675 -116.764,323.901 J4.9
KLINE_5: J5.9 P6.20 | length 156.8
  Top Layer w0.381: P6.20 -86.737,201.803 -67.767,201.803 -63.525,206.045 -63.525,321.685 -67.377,325.536 -72.025,325.536 -73.371,326.882 J5.9
KLINE_6: J6.9 P7.20 | length 156.8
  Top Layer w0.381: P7.20@-37.516,203.937 -35.474,201.895 -16.505,201.895 -12.263,206.137 -12.263,321.777 -16.114,325.628 -20.762,325.628 -22.109,326.974 J6.9
L: P8.5 P8.6 P8.7 P8.8 pad.6@-5.131,63.271
LED1: P1.19 R1.2 | length 282.1
  Top Layer w0.508: P1.19 -372.883,204.47 -409.346,204.47 -414.122,199.695 -414.122,19.152 -410.388,15.418 R1.2
LED2: P1.20 R2.2 | length 286.1
  Top Layer w0.508: P1.20 -369.382,201.752 -410.032,201.752 -413.131,198.653 -413.131,19.964 -409.778,16.612 -356.845,16.612 R2.2
LED3: P1.3 R3.2 | length 372.6
  Top Layer w0.508: P1.3 -370.198,255.067 -363.906,255.067 -356.489,247.65 -351.993,247.65 -348.996,244.653 -348.996,192.024 -352.273,188.747 -408.346,188.747 -412.217,184.876 -412.217,20.955 -408.711,17.45 -355.244,17.45 R3.2
LED4: P1.4 R4.2 | length 373.2
  Top Layer w0.508: P1.4 -363.568,257.142 -355.981,249.555 ; -352.704,249.555 -355.981,249.555 ; R4.2 -353.67,18.364 -407.365,18.364 -411.455,22.454 -411.455,184.633 -408.051,188.036 -351.79,188.036 -348.285,191.541 -348.285,245.72 -352.12,249.555 -355.981,249.555
LED_IN0_1: J1.4 P2.10 | length 130.5
  Top Layer w0.381: P2.10 -271.944,223.66 -270.469,225.136 -270.469,322.164 -269.062,323.571 -265.481,323.571 -264.693,324.358 J1.4
LED_IN0_2: J2.4 P3.10 | length 121
  Top Layer w0.381: P3.10 -230.022,223.635 -228.676,224.981 -228.676,240.817 -219.44,250.053 -219.44,323.917 -218.745,324.612 J2.4
LED_IN0_3: J3.4 P4.10 | length 127.9
  Top Layer w0.381: P4.10 -169.938,223.66 -168.462,225.136 -168.462,319.364 -172.847,323.748 J3.4
LED_IN0_4: J4.4 P5.10 | length 133.5
  Top Layer w0.381: P5.10 -122.491,223.635 -120.726,225.4 -120.726,246.99 -117.459,250.257 -117.459,319.338 -120.167,322.047 -127.914,322.047 -129.464,323.596 J4.4
LED_IN0_5: J5.4 P6.10 | length 143.2
  Top Layer w0.381: P6.10 -67.922,223.645 -66.446,225.12 -66.446,319.348 -69.155,322.056 -84.522,322.056 -86.071,323.606 J5.4
LED_IN0_6: J6.4 P7.10 | length 143.2
  Top Layer w0.381: P7.10@-37.516,223.737 -16.66,223.737 -15.184,225.212 -15.184,319.44 -17.892,322.148 -33.259,322.148 -34.809,323.698 J6.4
LED_IN1-1: J1.3 P2.9 | length 130.6
  Top Layer w0.381: P2.9 -295.588,225.873 -272.755,225.873 -271.053,227.574 -271.053,322.57 -267.233,326.39 J1.3
LED_IN1-2: J2.3 P3.9 | length 124.2
  Top Layer w0.381: P3.9 -244.56,225.847 -231.404,225.847 -229.26,227.99 -229.26,241.36 -220.024,250.596 -220.024,319.719 -221.691,321.386 -221.691,327.812 J2.3
LED_IN1-3: J3.3 P4.9 | length 131.7
  Top Layer w0.381: P4.9 -193.582,225.873 -170.748,225.873 -169.047,227.574 -169.047,318.856 -175.387,325.196 J3.3
LED_IN1-4: J4.3 P5.9 | length 138.6
  Top Layer w0.381: P5.9 -142.579,225.847 -123.174,225.847 -121.361,227.66 -121.361,247.456 -118.043,250.774 -118.043,318.83 -120.675,321.462 -130.48,321.462 -132.004,322.986 J4.3
LED_IN1-5: J5.3 P6.9 | length 148.2
  Top Layer w0.381: P6.9 -91.566,225.857 -68.732,225.857 -67.031,227.559 -67.031,318.84 -69.663,321.472 -87.087,321.472 -88.611,322.996 J5.3
LED_IN1-6: J6.3 P7.9 | length 148.2
  Top Layer w0.381: P7.9@-42.516,223.737 -40.304,225.949 -17.47,225.949 -15.768,227.651 -15.768,318.932 -18.4,321.564 -35.825,321.564 -37.349,323.088 J6.3
LED_IN2_1: J1.2 P2.8 | length 99.2
  Top Layer w0.381: P2.8 -274.627,249.222 -271.637,252.212 -271.637,324.145 -269.773,326.009 J1.2
LED_IN2_2: J2.2 P3.8 | length 99.8
  Top Layer w0.381: P3.8 -223.599,249.197 -220.609,252.187 -220.609,318.322 -223.876,321.589 -223.876,328.168 J2.2
LED_IN2_3: J3.2 P4.8 | length 104.3
  Top Layer w0.381: P4.8 -172.621,249.222 -169.631,252.212 -169.631,318.348 -172.187,320.904 -176.327,320.904 -177.927,322.504 J3.2
LED_IN2_4: J4.2 P5.8 | length 111.9
  Top Layer w0.381: P5.8 -121.618,249.197 -118.628,252.187 -118.628,318.322 -121.183,320.878 -132.944,320.878 -134.544,322.478 J4.2
LED_IN2_5: J5.2 P6.8 | length 119.5
  Top Layer w0.381: J5.2 -91.151,322.488 -89.551,320.888 -70.171,320.888 -67.615,318.332 -67.615,252.197 -70.605,249.206 P6.8
LED_IN2_6: J6.2 P7.8 | length 119.5
  Top Layer w0.381: J6.2 -39.889,322.58 -38.288,320.98 -18.908,320.98 -16.352,318.424 -16.352,252.289 -19.343,249.298 P7.8@-37.516,249.298
LEDMA: R25.2 RJ1.9 | length 27.6
  Top Layer w0.381: R25.2@-415.011,262.56 -415.417,262.966 -415.417,270.281 v1(-414.122,271.577) ; v1@-409.346,273.71 -409.346,277.419 -408.686,278.079 -403.609,278.079 RJ1.9 RJ1.9@-402.338,279.626
  Bottom Layer w0.381: v1(-414.122,271.577) -413.258,272.44 -410.591,272.44 v1(-409.321,273.71)
LEDMB: R26.2 RJ1.12 | length 20.6
  Top Layer w0.381: RJ1.12 -412.217,276.431 -412.217,272.161 -414.63,269.748 -414.63,265.405 R26.2
LIN_1_1: J1.8 P2.14 | length 146.6
  Top Layer w0.381: P2.14 -270.974,215.74 -268.132,218.583 -268.132,318.428 -265.682,320.878 -256.362,320.878 -254.533,322.707 J1.8
LIN_1_2: J2.8 P3.14 | length 134.8
  Top Layer w0.381: P3.14 -227.254,215.715 -225.501,217.468 -225.501,238.303 -217.103,246.701 -217.103,317.844 -208.585,326.362 J2.8
LIN_3: J3.8 P4.14 | length 136.9
  Top Layer w0.381: P4.14 -168.968,215.74 -166.126,218.583 -166.126,323.358 -162.687,326.796 J3.8
LIN_4: J4.8 P5.14 | length 135.8
  Top Layer w0.381: P5.14 -120.429,215.715 -117.754,218.389 -117.754,245.034 -115.122,247.666 -115.122,321.193 -119.304,325.374 J4.8
LIN_5: J5.8 P6.14 | length 144.7
  Top Layer w0.381: P6.14 -66.952,215.725 -64.11,218.567 -64.11,321.355 -67.707,324.952 -75.047,324.952 -75.911,325.815 J5.8
LIN_6: J6.8 P7.14 | length 144.7
  Top Layer w0.381: P7.14@-37.516,215.817 -15.69,215.817 -12.847,218.659 -12.847,321.447 -16.444,325.044 -23.785,325.044 -24.649,325.907 J6.8
N: P8.1 P8.2 P8.3 P8.4 pad.6@-5.131,54.407
NetC15_1: C15.1 U4.24 Y1.2 | length 15
  Top Layer w0.381: Y1.2 -416.027,252.728 -416.027,248.514 C15.1 -414.528,247.015 -409.473,247.015 -408.931,247.558 U4.24
NetC16_1: C16.1 U4.23 Y1.1 | length 24.3
  Top Layer w0.381: Y1.1 -416.814,256.821 -416.814,247.447 C16.1 -409.27,245.339 -408.281,246.328 U4.23
NetC17_1: C17.1 FB1.1 R29.1 R30.2 RJ1.4 | length 15.3
  Top Layer w0.381: FB1.1 -410.058,258.14 C17.1 -408.038,261.061 R29.1 v1(-408,260.121) ; -409.042,261.036 -409.042,264.871 ; -409.042,264.897 RJ1.4 ; v1(-405.232,260.083) R30.2
  Bottom Layer w0.381: v1@-407.962,260.083 v1(-405.232,260.083)
NetC18_1: C18.1 R31.1 R32.2 RJ1.5 | length 24.7
  Top Layer w0.381: RJ1.5@-409.232,268.237 RJ1.5 -407.518,270.231 -402.133,270.231 -400.355,268.453 R31.1 ; C18.1 R32.2
  Bottom Layer w0.381: v1(-403.327,260.121) v1(-400.355,260.121)
NetC20_2: C20.2 U4.1@-411.531,241.833 | length 3.2
  Top Layer w0.381: C20.2 U4.1@-411.531,241.833
NetD1_2: D1.2 L1.1 U1.2
NetD2_2: D2.2 L2.1 U3.2
NetD3_2: D3.2 L3.1 U4.2@-114.681,121.795
NetJ7_1: J7.1 R1.1 | length 5.6
  Top Layer w0.508: J7.1 R1.1
NetJ7_2: J7.2 R2.1 | length 5.5
  Top Layer w0.508: J7.2@-355.625,8.382 R2.1
NetJ7_3: J7.3 R3.1 | length 5.5
  Top Layer w0.508: J7.3 R3.1
NetJ7_4: J7.4 R4.1 | length 5.4
  Top Layer w0.508: J7.4@-350.622,8.357 R4.1
NetR15_2: R15.2 R23.1 U4.4@-409.581,241.833 | length 7.8
  Top Layer w0.381: R23.1 -414.16,236.296 R15.2 ; R15.2@-412.775,237.795 R15.2 ; U4.4@-409.581,241.833 -409.581,240.608 -412.394,237.795 R15.2
NetR17_2: R17.2 U4.6 | length 5.2
  Top Layer w0.381: R17.2 -408.281,240.588 U4.6
NetR18_2: R18.2 U4.7 | length 4.8
  Top Layer w0.381: R18.2 -407.631,239.65 U4.7
NetR19_2: R19.2 U4.8 | length 4.4
  Top Layer w0.381: R19.2 -406.981,238.713 U4.8
NetR20_2: R20.2@-406.311,237.795 U4.9 | length 4
  Top Layer w0.381: R20.2@-406.311,237.795 U4.9@-406.311,241.814
NetR21_2: R21.2@-403.136,237.795 U4.10 | length 5.1
  Top Layer w0.381: U4.10 -405.681,240.339 R21.2@-403.136,237.795
NetR22_2: R22.2 U4.14 | length 2.2
  Top Layer w0.381: U4.14@-403.055,241.808 R22.2
NetR25_1: R25.1 U4.27 | length 14.2
  Top Layer w0.381: R25.1@-413.487,262.56 -412.725,261.798 -412.725,253.06 -410.881,251.216 U4.27
NetR26_1: R26.1 U4.26 | length 12.3
  Top Layer w0.381: R26.1@-411.658,261.036 -411.785,260.909 -411.785,252.959 -410.231,251.405 U4.26
PGND: P8.9 P8.10 P8.11 P8.12 pad.6@-5.131,72.136
TPIN1_N: R32.1 RJ1.6 U4.12 | length 36.2
  Top Layer w0.381: U4.12 -404.381,243.013 -402.057,245.337 -402.057,262.509 ; R32.1 -402.057,262.509 ; v1(-402.742,267.056) -402.057,266.37 -402.057,262.509
  Bottom Layer w0.381: RJ1.6 -409.397,267.081 v1@-402.742,267.081
TPIN1_P: R31.2 RJ1.3 U4.13 | length 35.1
  Top Layer w0.381: RJ1.3 -406.832,268.656 -405.841,269.646 -402.819,269.646 -401.396,268.224 -401.396,245.1 -403.731,242.765 U4.13 ; -401.345,257.683 R31.2
TPOUT1_N: R30.1 RJ1.2 U4.16 | length 18.6
  Top Layer w0.381: -406.095,262.509 R30.1 ; RJ1.2 -406.248,265.151 -406.248,258.572 -403.731,256.055 U4.16
TPOUT1_P: R29.2 RJ1.1 U4.17 | length 22.4
  Top Layer w0.381: R29.2@-408.127,262.547 -406.895,262.547 ; U4.17 -404.381,255.74 -406.857,258.216 -406.857,266.116 -404.597,268.376 RJ1.1
VCC+5V: C11.1 C12.1 L2.2 P1.5 P1.6 P2.5 P2.6 P3.5 P3.6 P4.5 P4.6 P5.5 P5.6 P6.5 P6.6 P7.5 P7.6 U3.4 | length 548.7
  Top Layer w0.762: v1(-83.314,125.21) -76.786,125.21 -74.701,127.294 v1(-74.701,132.374)
  Bottom Layer w0.762: U3.4@-85.623,125.21 v1(-83.314,125.21) ; v1(-74.701,132.374) -74.701,134.762
  Bottom Layer w2.5: P1.5 P1.6 -363.463,253.182 -359.47,249.19 -340.319,249.19 -336.336,253.173 P2.5@-297.81,253.173 ; P2.5 P2.6 -288.99,253.182 -284.998,249.19 -265.846,249.19 -261.863,253.173 P3.5@-246.788,253.173 ; P3.5@-246.753,253.176 -237.942,253.176 -233.95,249.184 -214.798,249.184 -210.815,253.166 ; -210.8,253.182 P4.5 ; P4.5@-195.775,253.201 -186.964,253.201 -182.972,249.209 -163.82,249.209 -159.838,253.192 ; -159.803,253.157 P5.5 ; P5.5@-144.772,253.176 -135.961,253.176 -131.969,249.184 -112.817,249.184 -108.834,253.166 P6.5 P6.6 -84.968,253.166 -80.975,249.174 -61.824,249.174 -57.841,253.157 P7.5 P7.6 -32.558,253.157 -13.03,233.629 -13.03,164.084 -18.567,158.547 -63.475,158.547 -68.529,153.492 -68.529,140.538
VCC+12V: C4.1 C5.1 L1.2 P2.3 P2.4 P3.3 P3.4 P4.3 P4.4 P5.3 P5.4 P6.3 P6.4 P7.3 P7.4 S1.1 S1.2 S2.1 S2.2 S3.1 S3.2 S4.1 S4.2 S5.1 S5.2 S6.1 S6.2 U1.4 | length 867
  Top Layer w0.762: v1(-52.503,125.21) -45.976,125.21 -43.891,127.294 v1(-43.891,132.374)
  Bottom Layer w0.762: U1.4@-54.813,125.21 v1(-52.503,125.21) ; v1(-43.891,132.374) -43.891,134.762
  Bottom Layer w2.5: P2.3 -288.17,257.142 -284.836,260.477 -266.186,260.477 -262.841,257.133 P3.3@-246.788,257.133 ; S1.1 -284.429,328.219 -281.229,331.419 -246.405,331.419 -243.18,328.193 S2.1 -238.43,328.193 -235.026,331.597 -202.514,331.597 -199.085,328.168 S3.1 ; P3.3@-246.753,257.136 -237.478,257.136 -233.375,261.239 -215.906,261.239 -211.794,257.126 ; -211.778,257.142 P4.3 ; P4.3@-195.775,257.161 -186.043,257.161 -181.788,261.417 -165.081,261.417 -160.816,257.152 ; -192.151,328.168 S3.1 ; -160.781,257.117 P5.3 ; P5.3@-144.772,257.136 -136.615,257.136 -132.74,261.01 -113.697,261.01 -109.813,257.126 P6.3 P6.4 -83.716,257.126 -79.502,261.341 -63.043,261.341 -58.819,257.117 P7.3 P7.4 -31.249,257.117 -21.565,266.802 -5.486,266.802 -2.337,269.951 ; L1.2 -44.521,150.196 -40.411,154.305 -8.001,154.305 -2.337,159.969 -2.337,269.951 ; S3.1 -190.221,331.572 -156.667,331.572 -153.314,328.219 S4.1 -149.504,328.219 -146.279,331.445 -113.614,331.445 -110.398,328.228 S5.1 -105.858,328.228 -102.692,331.394 -70.18,331.394 -59.842,321.056 -53.746,321.056 -43.383,331.419 -7.188,331.419 -2.337,326.568 -2.337,269.951
VCC+12V-1: C32.1 C33.1 L3.2 R21.2@-219.532,94.463 U4.4@-114.681,125.195 | length 189.9
  Top Layer w0.762: v1(-112.397,125.235) -105.869,125.235 -103.784,127.32 v1(-103.784,132.4)
  Top Layer w2.54: -209.271,104.038 -209.271,142.697
  Bottom Layer w0.762: U4.4@-114.706,125.235 v1(-112.397,125.235) ; v1(-103.784,132.4) -103.784,134.787
  Bottom Layer w2.54: -218.77,94.463 -212.979,94.463 -209.245,98.196 -209.245,103.759 ; -209.245,142.9 -202.59,149.555 -107.823,149.555 -104.312,146.044 L3.2
  other v1: -209.245,103.454 -209.931,103.81 -208.61,103.886 -209.271,104.546 -209.271,142.342 -209.956,142.697 -208.636,142.773 -209.296,143.434
WLINE-1: J1.10 P2.19 | length 174.7
  Top Layer w0.381: P2.19 -294.87,200.93 -270.57,200.93 -266.964,204.537 -266.964,274.387 v1(-265.998,275.352)
  Bottom Layer w0.381: -267.513,321.767 -267.513,321.742 ; v1(-265.998,275.352) -267.513,276.866 -267.513,321.742 ; J1.10 -249.453,324.79 -249.453,324.663 -250.774,323.342 -265.913,323.342 -267.513,321.742
WLINE-2: J2.10 P3.19 | length 166.1
  Top Layer w0.381: P3.19 -243.841,200.904 -225.73,200.904 -224.079,202.555 -224.079,237.287 -215.935,245.431 ; -215.935,245.618 -215.935,245.431 ; v1(-214.97,275.326) -215.935,274.361 -215.935,245.431
  Bottom Layer w0.381: v1(-214.97,275.326) -216.484,276.841 -216.484,321.742 -216.484,323.342 -214.935,324.891 -204.978,324.891 -203.505,326.365 J2.10
WLINE-3: J3.10 P4.19 | length 163.8
  Top Layer w0.381: P4.19 -192.864,200.93 -168.564,200.93 -164.957,204.537 -164.957,274.387 v1(-163.992,275.352)
  Bottom Layer w0.381: v1(-163.992,275.352) -165.506,276.866 -165.506,321.767 -165.506,324.206 -164.16,325.552 -160.299,325.552 J3.10
WLINE-4: J4.10 P5.19 | length 158.4
  Top Layer w0.381: P5.19 -141.86,200.904 -117.561,200.904 -116.256,202.209 -116.256,244.078 -113.954,246.38 -113.954,274.361 v1(-112.989,275.326)
  Bottom Layer w0.381: J4.10 -114.224,324.764 -114.503,324.485 -114.503,321.742 -114.503,276.841 v1(-112.989,275.326)
WLINE-5: J5.10 P6.19 | length 163.9
  Top Layer w0.381: P6.19 -90.848,200.914 -66.548,200.914 -62.941,204.521 -62.941,274.371 v1(-61.976,275.336)
  Bottom Layer w0.381: J5.10 -70.831,324.774 -69.536,323.479 -65.218,323.479 -63.49,321.751 ; -63.49,321.777 -63.49,321.751 ; v1(-61.976,275.336) -63.49,276.85 -63.49,318.195 -63.49,321.751
WLINE-6: J6.10 P7.19 | length 163.8
  Top Layer w0.381: P7.19@-42.516,203.937 -39.585,201.006 -15.286,201.006 -11.679,204.613 -11.679,274.463 v1(-10.714,275.428)
  Bottom Layer w0.381: J6.10 -19.569,324.866 -18.273,323.571 -13.955,323.571 -12.228,321.843 -12.228,276.942 v1(-10.714,275.428)
pads on no net: J7.6 RJ1.H1 RJ1.H2 RJ1.H3 RJ1.H4 U4.3@-410.231,241.833 U4.5@-408.931,241.833

## Polygon pours and split planes (outlines as drawn)
GND on Top Layer "Mechanical 3-No Net" (solid, remove dead copper, pour order 7): -418.846,263.677 -399.771,263.677 -399.771,232.486 -399.771,232.537 -418.897,232.537
GND on Bottom Layer "Mechanical 3-No Net" (solid, remove dead copper, pour order 5): -9.931,109.88 -10.008,109.804 -27.076,109.804 -31.166,109.804 -41.529,99.441 -42.545,98.425 -127.229,98.425 -127.229,156.286 -8.179,156.286 -8.179,109.88
GND on Bottom Layer "Mechanical 3-No Net" (solid, remove dead copper, pour order 10): -418.998,263.754 -399.669,263.754 -399.669,232.639 -399.669,232.562 -418.998,232.562

## Keep-outs
Keep-Out Layer:
  circle w0.203: c-413.019,9.047 r2
  circle w0.203: c-210.019,9.047 r2
  circle w0.203: c-7.019,9.047 r2
  circle w0.203: c-413.019,231.187 r2
  circle w0.203: c-333.019,231.187 r2
  circle w0.203: c-216.719,231.187 r2
  circle w0.203: c-111.685,231.187 r2
  circle w0.203: c-6.985,231.187 r2
  circle w0.203: c-57.995,326.136 r2
  circle w0.203: c-352.995,326.136 r2
  circle w0.203: c-164.69,156.989 r2
  circle w0.203: c-405.804,33.505 r3
  circle w0.203: c-243.804,33.505 r3
  circle w0.203: c-405.804,143.505 r3
  circle w0.203: c-243.796,143.495 r3
  circle w0.203: c-401.004,24.505 r3
  circle w0.203: c-19,24.5 r3
  circle w0.203: c-219,24.5 r3
  circle w0.203: c-19,147.5 r3
  circle w0.203: c-219,147.5 r3
  circle w0.203: c-7.5,313 r3
  circle w0.203: c-159,313 r3
  circle w0.203: c-371.5,313 r3
  circle w0.203: c-384.8,197.5 r2.5
  circle w0.203: c-384.8,267.5 r2.5
  circle w0.203: c-354.8,255.1 r2.5
  circle w0.203: c-354.8,207.5 r2.5
  circle w0.203: c-280.3,207.5 r2.5
  circle w0.203: c-280.3,255.1 r2.5
  circle w0.203: c-310.3,267.5 r2.5
  circle w0.203: c-310.3,197.5 r2.5
  circle w0.203: c-229.3,207.5 r2.5
  circle w0.203: c-229.3,255.1 r2.5
  circle w0.203: c-259.3,267.5 r2.5
  circle w0.203: c-259.3,197.5 r2.5
  circle w0.203: c-178.3,207.5 r2.5
  circle w0.203: c-178.3,255.1 r2.5
  circle w0.203: c-208.3,267.5 r2.5
  circle w0.203: c-208.3,197.5 r2.5
  circle w0.203: c-127.3,207.5 r2.5
  circle w0.203: c-157.3,267.5 r2.5
  circle w0.203: c-157.3,197.5 r2.5
  circle w0.203: c-76.3,207.5 r2.5
  circle w0.203: c-76.3,255.1 r2.5
  circle w0.203: c-106.3,267.5 r2.5
  circle w0.203: c-106.3,197.5 r2.5
  circle w0.203: c-25.3,207.5 r2.5
  circle w0.203: c-25.3,255.1 r2.5
  circle w0.203: c-55.3,267.5 r2.5
  circle w0.203: c-55.3,197.5 r2.5
  circle w0.203: c-127.294,255.11 r2.5
  lines w0.254: -420.065,286.106 -400.971,286.106 ; -420,285.942 -420,0 0,0 0,335 -368.3,335 -368.3,318.1 -400.874,318.1 ; -400.874,286.106 -400.874,317.932 ; -392.3,164 -347.3,164 -347.3,186 -392.3,186 -392.3,164 ; -392.3,279 -347.3,279 -347.3,301 -392.3,301 -392.3,279 ; -317.8,164 -317.8,186 -272.8,186 -272.8,164 -317.8,164 ; -317.8,279 -317.8,301 -272.8,301 -272.8,279 -317.8,279 ; -266.8,164 -221.8,164 -221.8,186 -266.8,186 -266.8,164 ; -266.8,279 -221.8,279 -221.8,301 -266.8,301 -266.8,279 ; -215.8,164 -170.8,164 -170.8,186 -215.8,186 -215.8,164 ; -215.8,279 -170.8,279 -170.8,301 -215.8,301 -215.8,279 ; -164.8,164 -119.8,164 -119.8,186 -164.8,186 -164.8,164 ; -164.8,279 -119.8,279 -119.8,301 -164.8,301 -164.8,279 ; -113.8,164 -68.8,164 -68.8,186 -113.8,186 -113.8,164 ; -113.8,279 -68.8,279 -68.8,301 -113.8,301 -113.8,279 ; -62.8,164 -17.8,164 -17.8,186 -62.8,186 -62.8,164 ; -62.8,279 -17.8,279 -17.8,301 -62.8,301 -62.8,279

## Other copper
Top Layer:
  rectangle net N: -14.63,52.121 -1.803,58.877
  rectangle net L: -14.63,59.995 -1.753,66.802
  rectangle net PGND: -14.199,68.047 -1.88,74.727
Bottom Layer:
  rectangle net N: -19.431,52.156 -1.829,58.912
  rectangle net L: -19.431,60.076 -1.829,66.832
  rectangle net PGND: -19.431,67.996 -1.829,74.752
  region net VCC+12V-1: -95.047,137.708 -95.047,143.093 -107.01,143.093 -107.01,137.708
  region net NetD3_2: -117.043,121.097 -117.043,142.89 -118.923,142.89 -118.923,121.097
  region net NetD3_2: -113.004,121.097 -113.004,122.468 -117.602,122.468 -117.602,121.097
  region net NetD3_2: -115.036,130.114 -115.036,132.628 -117.627,132.628 -117.627,130.114
  region net VCC+12V-1: -101.473,133.746 -101.473,143.017 -107.188,143.017 -107.188,133.746
  region net 24V: -113.055,109.895 -113.055,120.665 -118.872,120.665 -118.872,109.895
  region net 24V: -92.837,109.895 -92.837,115.94 -118.872,115.94 -118.872,109.895
  region net 24V: -58.293,109.87 -58.293,115.915 -93.294,115.915 -93.294,109.87
  region net 24V: -83.972,109.87 -83.972,120.639 -89.789,120.639 -89.789,109.87
  region net VCC+5V: -66.141,137.607 -66.141,142.991 -78.105,142.991 -78.105,137.607
  region net VCC+5V: -72.39,133.72 -72.39,142.991 -78.105,142.991 -78.105,133.72
  region net NetD2_2: -85.953,130.088 -85.953,132.603 -88.544,132.603 -88.544,130.088
  region net NetD2_2: -83.921,121.071 -83.921,122.443 -88.519,122.443 -88.519,121.071
  region net NetD2_2: -87.96,121.071 -87.96,142.864 -89.84,142.864 -89.84,121.071
  region net 24V: -47.828,109.87 -47.828,115.915 -58.979,115.915 -58.979,109.87
  region net 24V: -53.162,109.87 -53.162,120.639 -58.979,120.639 -58.979,109.87
  region net VCC+12V: -35.331,137.607 -35.331,142.991 -47.295,142.991 -47.295,137.607
  region net VCC+12V: -41.58,133.72 -41.58,142.991 -47.295,142.991 -47.295,133.72
  region net NetD1_2: -55.143,130.088 -55.143,132.603 -57.734,132.603 -57.734,130.088
  region net NetD1_2: -53.111,121.071 -53.111,122.443 -57.709,122.443 -57.709,121.071
  region net NetD1_2: -57.15,121.071 -57.15,142.864 -59.029,142.864 -59.029,121.071

## Text inside footprints (layer, text, board x,y; h text height)
RJ1: Top Overlay "1" at -399.637,268.726 h0.79 r180; Top Overlay "8" at -417.087,266.026 h0.79 r180